# Altium PCB ATACS_PCB.PcbDoc
Units mm, origin at the board's own origin, x right, y up, seen from the top; angles counter-clockwise.
Board outline 80 x 100 mm, 4 copper layers (Top Layer, Signal Layer 1, Signal Layer 2, Bottom Layer), stack 1.534 mm thick; 103 components, 71 nets, 410 pads, 81 vias.
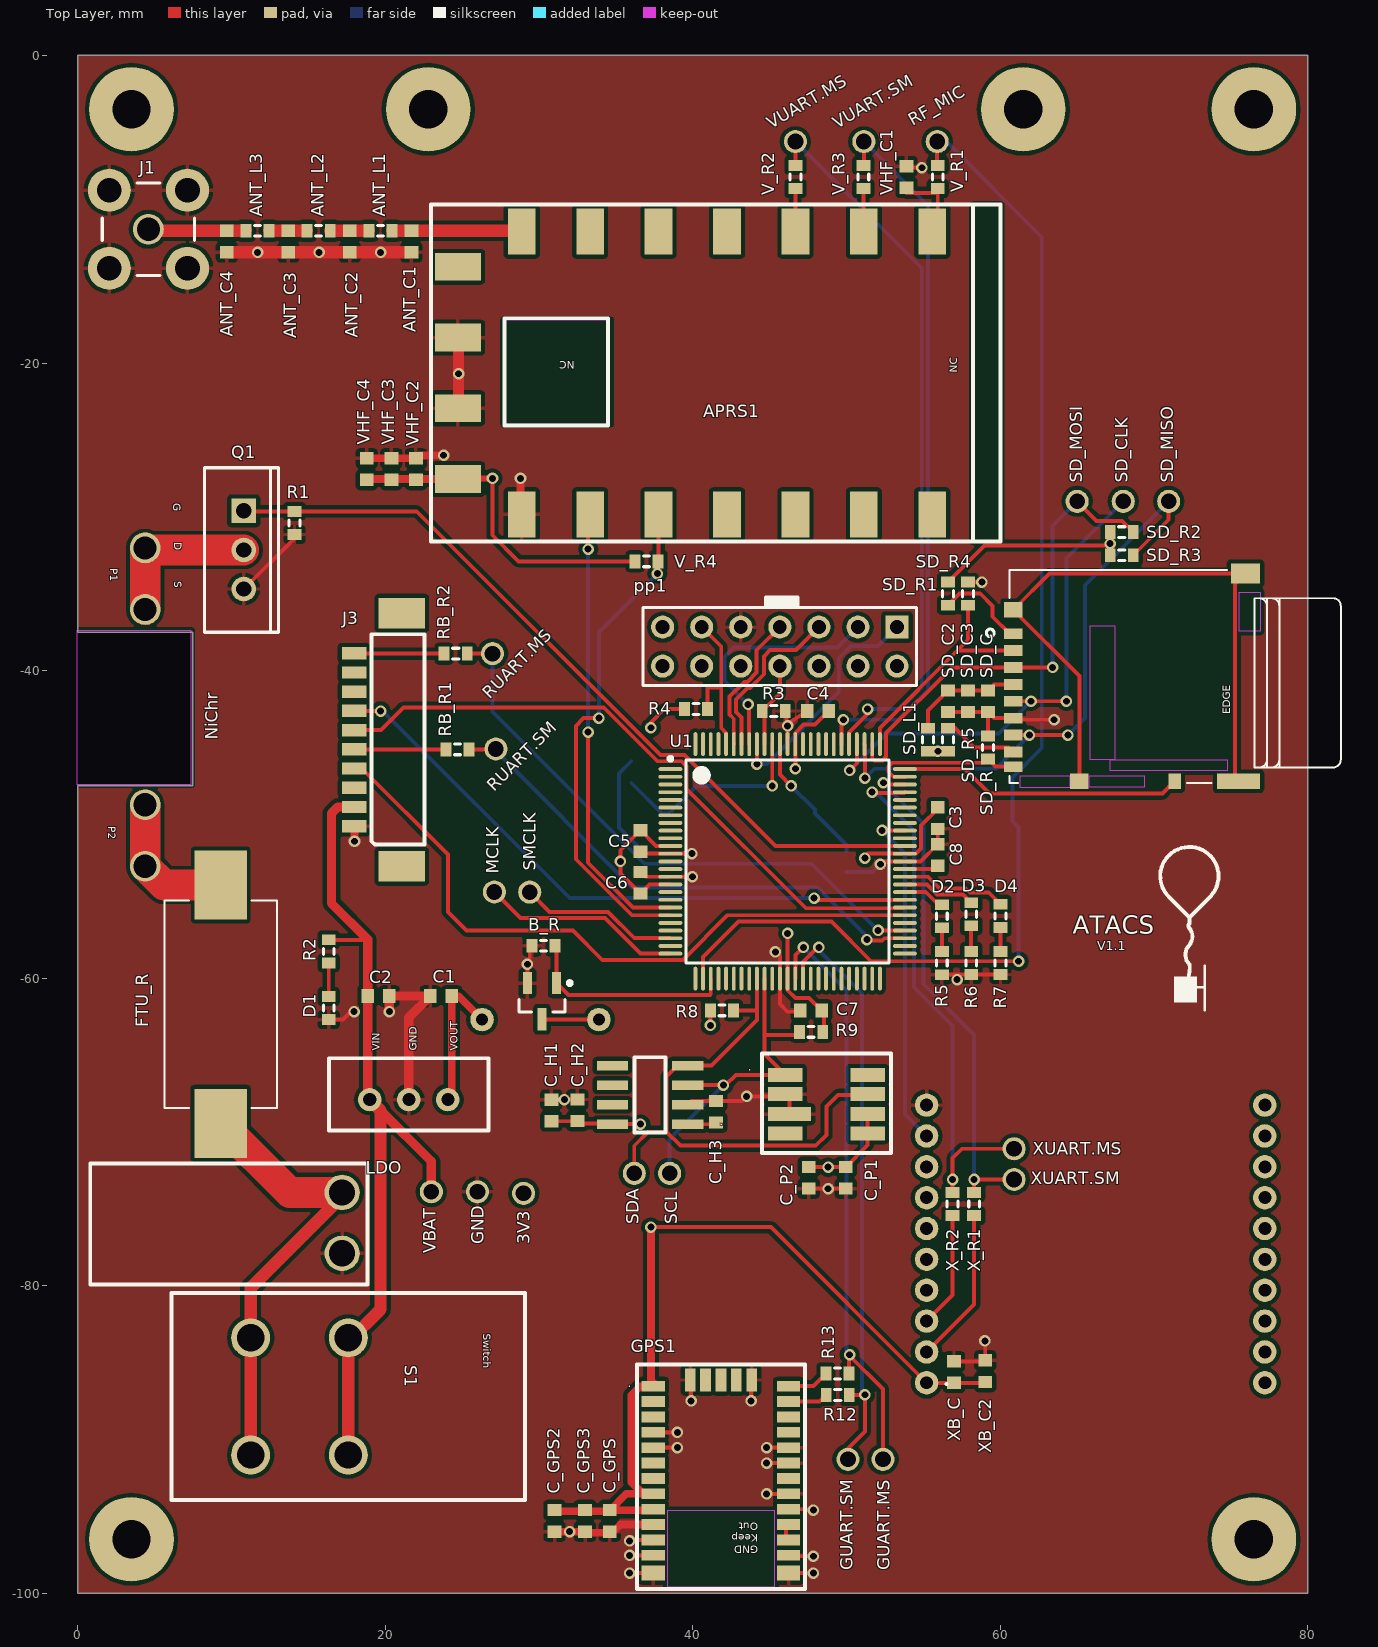
[diagram p0: Top Layer view]
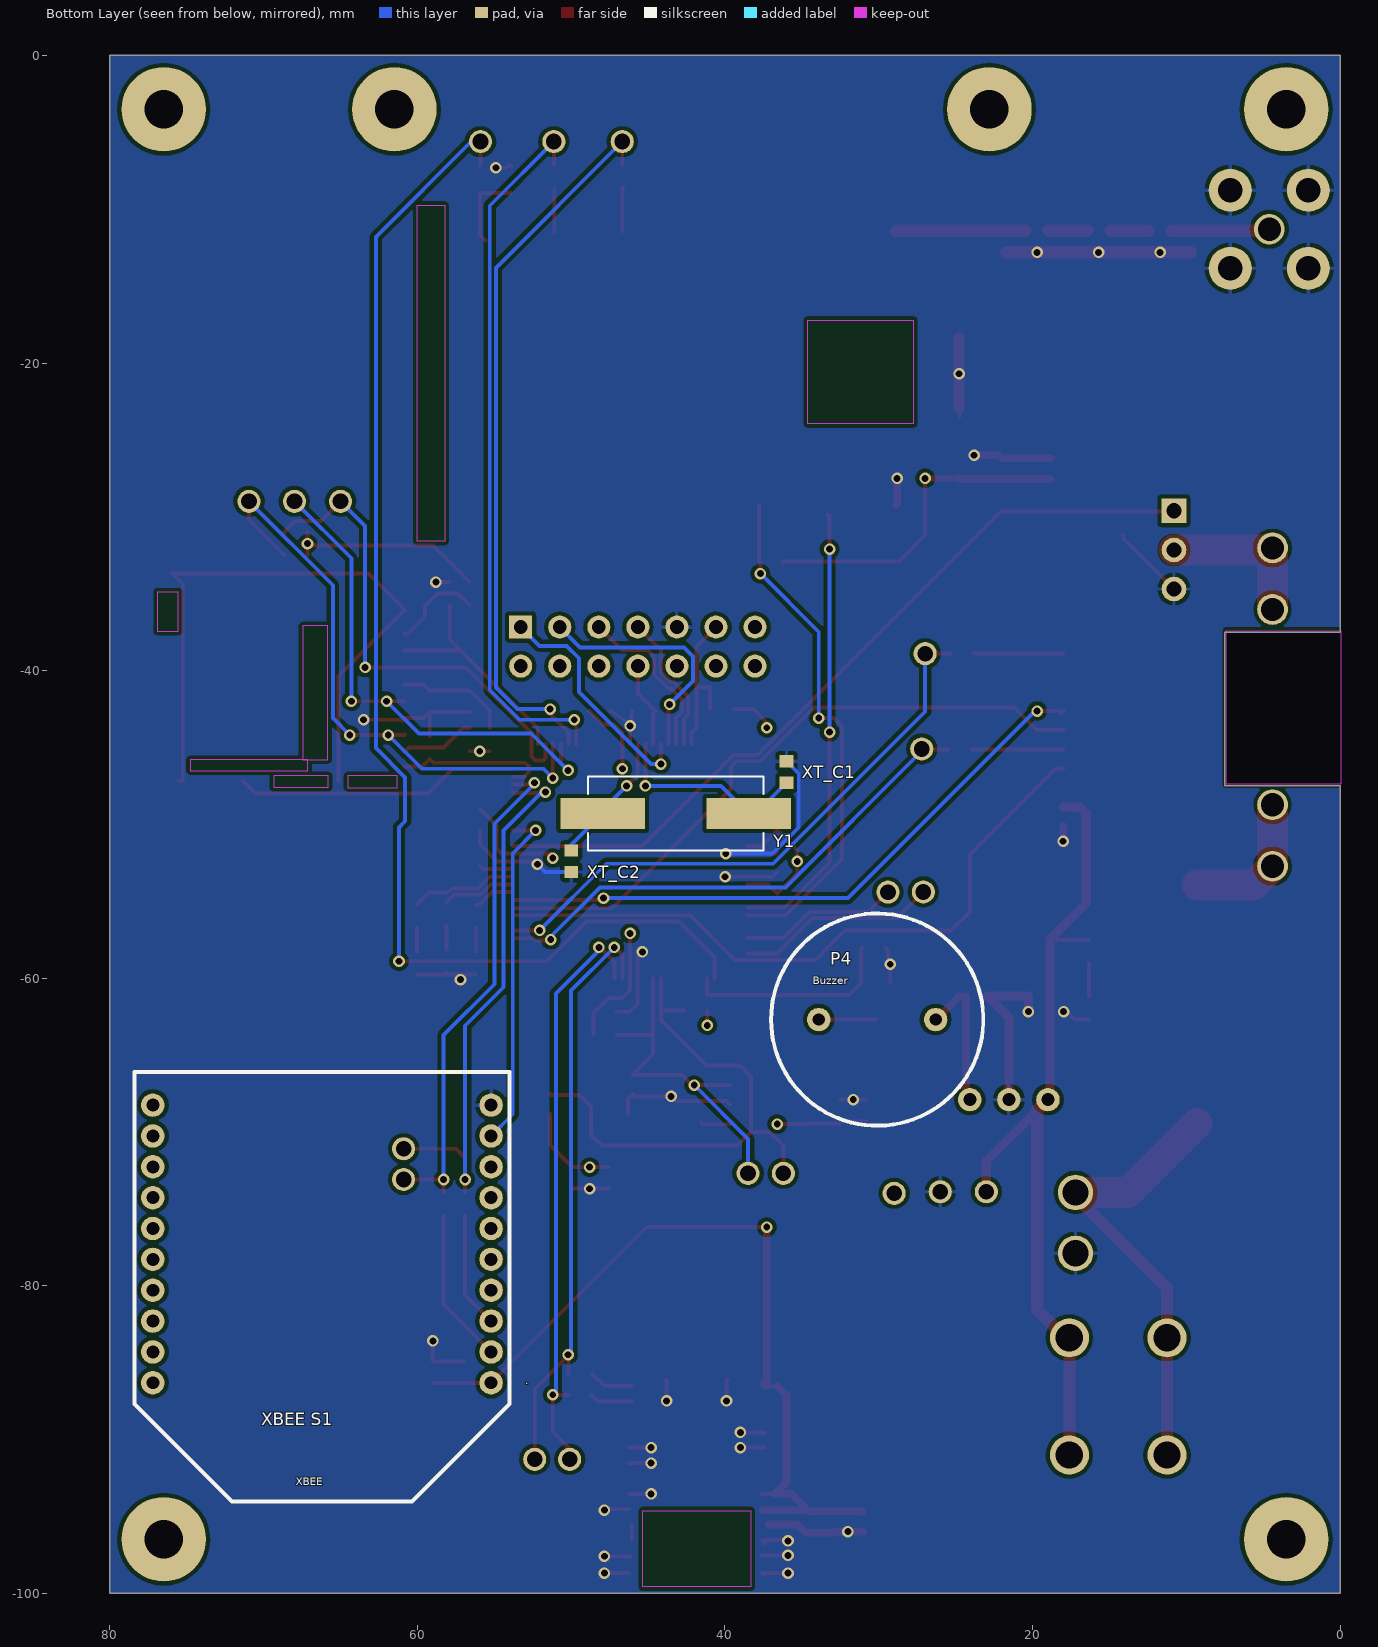
[diagram p1: Bottom Layer view, seen from below]
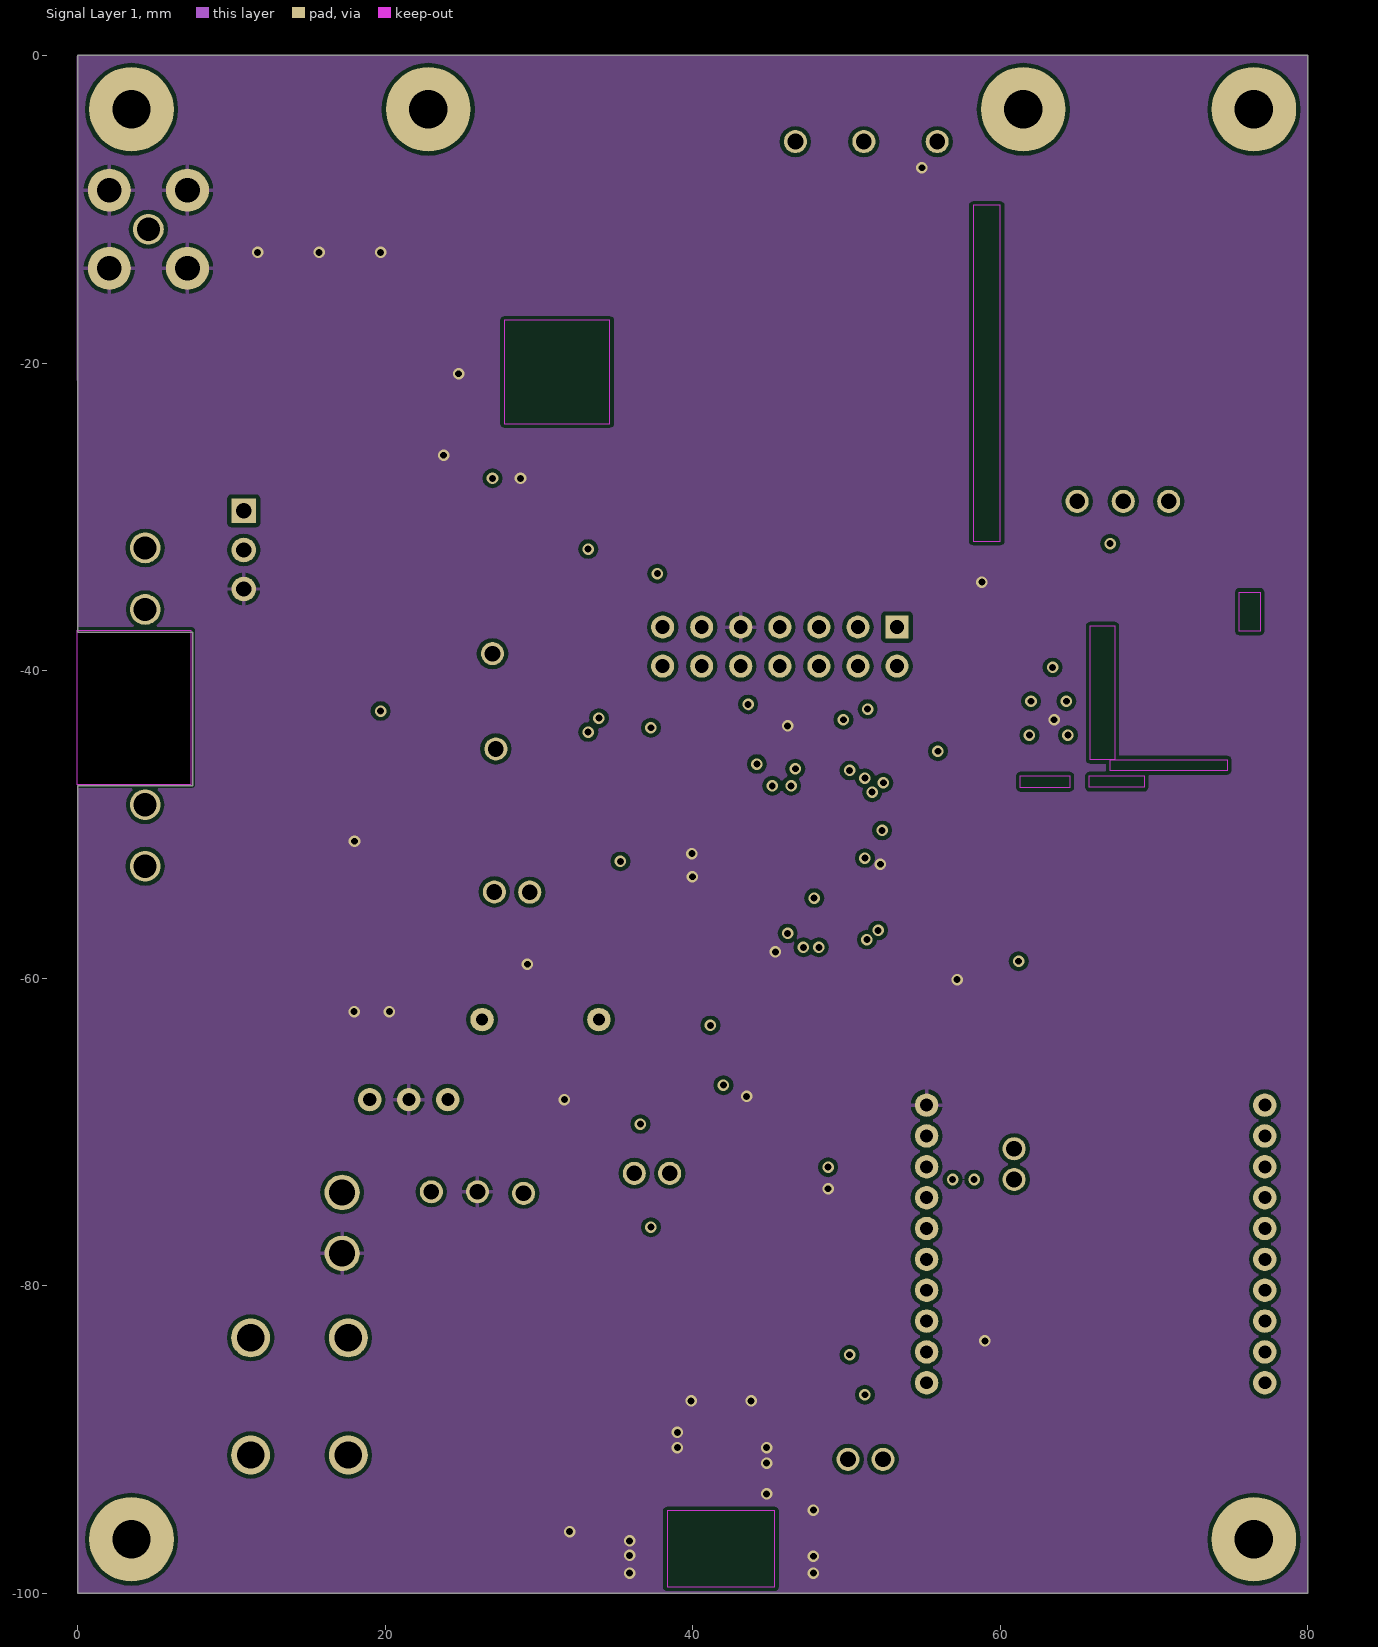
[diagram p2: Signal Layer 1]
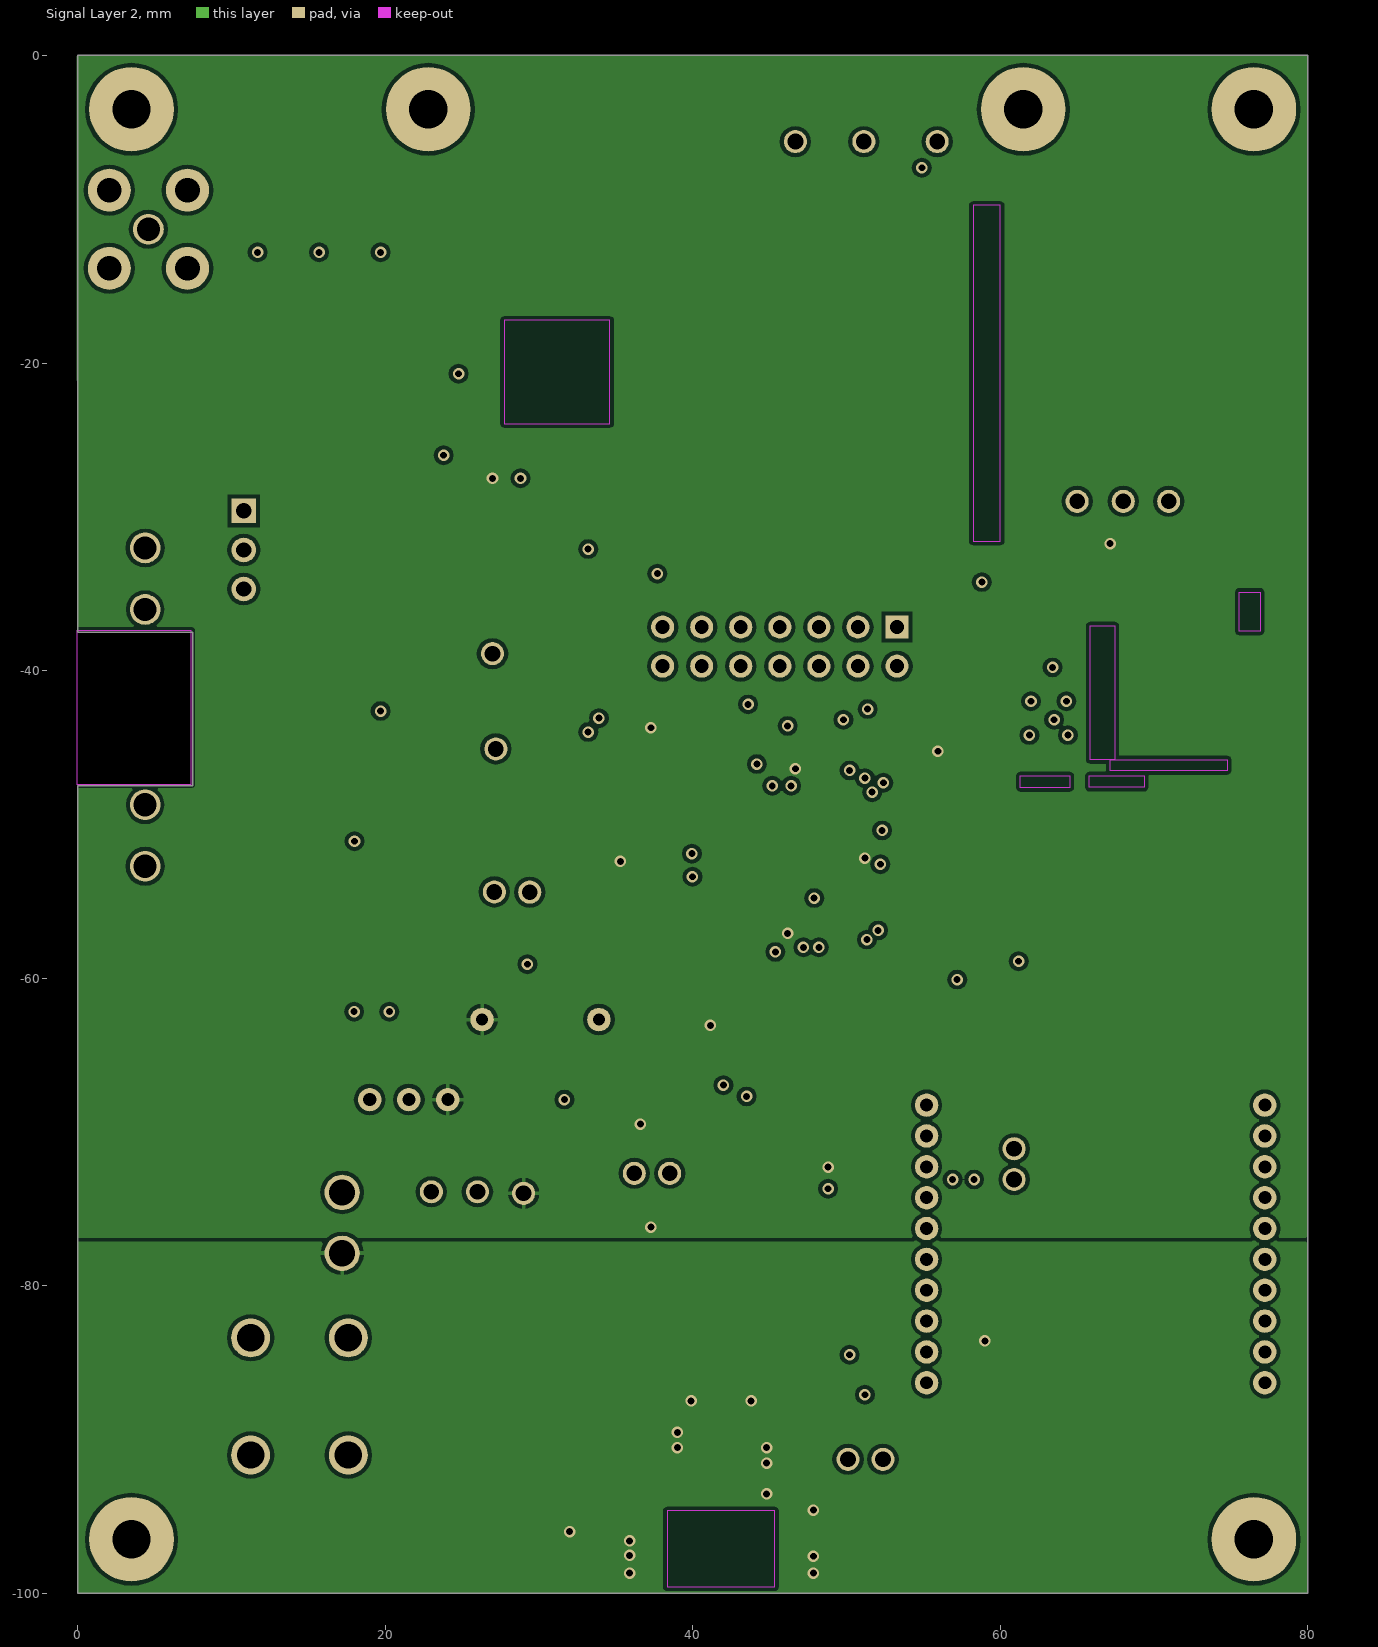
[diagram p3: Signal Layer 2]

## Layer stack, top to bottom
Top Solder: solder mask 0.0203, Solder Resist, Dk 3.5
Top Layer: signal copper 0.066
Dielectric 1: core 0.508, FR-4, Dk 4.2
Signal Layer 1: signal copper 0.066
Dielectric 3: prepreg 0.254, Dk 4.2
Signal Layer 2: signal copper 0.066
Dielectric 2: core 0.508, Dk 4.2
Bottom Layer: signal copper 0.066
Bottom Solder: solder mask 0.0203, Solder Resist, Dk 3.5

## Board outline
0,-100 0,-47.5 7.5,-47.5 7.5,-37.5 0,-37.5 0,0 80,0 80,-100
cut-out: -0.055,-47.4 7.4,-47.4 7.4,-37.426 -0.055,-37.426

## Design rules (kind name [scope] priority, off if disabled: settings)
AssemblyTestPointUsage SilkToBoardRegionClearance [All] p2:
Clearance "Clearance Pour" [InPolygon] p1: gap=0.254 ignorepadtopadclearanceinfootprint=FALSE except(0: Arc-Hole Track-Hole SMDPad-Hole THPad-Hole Via-Hole Fill-Hole Poly-Hole Region-Hole Text-Hole)
Clearance "Clearance Pad" [(IsPad) vs (IsPad)] p2: gap=0.14 ignorepadtopadclearanceinfootprint=FALSE except(0: Arc-Hole Track-Hole SMDPad-Hole THPad-Hole Via-Hole Fill-Hole Poly-Hole Region-Hole Text-Hole)
Clearance [All] p3: gap=0.152 ignorepadtopadclearanceinfootprint=FALSE except(0: Arc-Hole Track-Hole SMDPad-Hole THPad-Hole Via-Hole Fill-Hole Poly-Hole Region-Hole Text-Hole)
ComponentClearance [All] p1: gap=0 collisioncheckmode=3 verticalgap=0 showdistances=FALSE
Height [All] p1: minheight=0 maxheight=50.8 prefheight=12.7
HoleSize [All] p1: absolutevalues=TRUE maxlimit=6.35 minlimit=0.45 maxpercent=80.000 minpercent=20.000
HoleSize Testpoint [All] p2: absolutevalues=TRUE maxlimit=2.54 minlimit=0.025 maxpercent=80.000 minpercent=20.000
HoleSize TestPointUsage [All] p3: absolutevalues=TRUE maxlimit=2.54 minlimit=0.025 maxpercent=80.000 minpercent=20.000
MinimumAnnularRing [All] p1: minimumring=0.127
MinimumSolderMaskSliver [All] p1 off: minsoldermaskwidth=0.127
MinimumSolderMaskSliver SilkscreenOverComponentPads [All] p2 off: minsoldermaskwidth=0.254
PasteMaskExpansion [All] p1: expansion=0.051
PlaneClearance [All] p1: clearance=0.254
PlaneConnect [All] p1: planeconnectstyle=Direct reliefexpansion=0.508 reliefentries=4 reliefconductorwidth=0.508 reliefairgap=0.254
PolygonConnect PolygonConnectPads [(InPadClass('All Pads'))] p1: connectstyle=Relief reliefconductorwidth=0.254 reliefentries=4 polygonreliefangle="90 Angle" airgapwidth=0.254
PolygonConnect [All] p2: connectstyle=Direct reliefconductorwidth=0.508 reliefentries=4 polygonreliefangle="90 Angle" airgapwidth=0.254
RoutingVias [All] p1: holewidth=0.254 width=0.559 viastyle="Through Hole" minholewidth=0.254 minwidth=0.508 maxholewidth=6.35 maxwidth=25.4
SilkToBoardRegionClearance SilkToBoardRegionClearance2 [All] p1 off:
SilkToSilkClearance [All] p1 off: silktosilkclearance=0.127
SilkToSolderMaskClearance [IsPad] p1 off: minsilkscreentomaskgap=0.254 clearancetoexposedcopper=TRUE
SolderMaskExpansion [All] p1: expansion=0.102
Width Width_1 [All] p1: maxlimit=254 minlimit=0.127 preferedwidth=0.254
20 further rules are at their usual default settings.

## Classes and differential pairs
component class Telemetry: ANT_C1 ANT_C2 ANT_C3 ANT_C4 ANT_L1 ANT_L2 ANT_L3 APRS1 J1 J3 RB_R1 RB_R2 RF_MIC SD_C SD_C2 SD_C3 SD_L1 SD_R SD_R1 SD_R2 SD_R3 SD_R4 SD_R5 V_R1 V_R2 V_R3 V_R4 VHF_C1 VHF_C2 VHF_C3 VHF_C4 X_R1 X_R2 XB_C XB_C2 "XBEE S1"
component class Sensors: C_GPS C_GPS2 C_GPS3 C_H1 C_H2 C_H3 C_P1 C_P2 GPS1 R8 R9 R12 R13
component class MSP430: B_R C3 C4 C5 C6 C7 C8 D2 D3 D4 G_RX G_TX GUART.MS GUART.SM MCLK P4 R3 R4 R5 R6 R7 RUART.MS RUART.SM SCL "SCL1 TP" "SCL2 TP" SD_CLK SD_MISO SD_MOSI SDA "SDA1 TP" "SDA2 TP" SMCLK U1 VUART.MS VUART.SM XT_C1 XT_C2 XUART.MS XUART.MS1 XUART.SM XUART.SM1 Y1
component class EPS: 3V3 "3v3 ldo" C1 C2 D1 GND LDO R2 S1 VBAT
component class ATACS_SCH: FTU_R NiChr pp1 Q1 R1

## Components (designator, comment, footprint, x,y, rotation, side; value= is the part's Value field where it differs from the comment)
3V3 "Testpoint" TESTPOINT 29,-74 r90 top (schematic designator T3V3)
ANT_C1 "Ceramic" 1608[0603] 21.7,-12.1 r90 top value=20pF
ANT_C2 "Ceramic" 1608[0603] 17.7,-12.1 r90 top value=36pF
ANT_C3 "Ceramic" 1608[0603] 13.7,-12.1 r90 top value=36pF
ANT_C4 "Ceramic" 1608[0603] 9.7,-12.1 r90 top value=20pF
ANT_L1 "Inductor" J1-0603 19.7,-11.4 r180 top value=56nH
ANT_L2 "Inductor" J1-0603 15.671,-11.4 r180 top value=68nH
ANT_L3 "Inductor" J1-0603 11.7,-11.4 r180 top value=56nH
APRS1 "RF Transmitter" "APRS Transmitter" 42.229,-20.645 r180 top
B_R "Resistor" J1-0603 30.3,-57.9 r0 top value=10k
"Battery Connector1" "Header 2H" BAT 17.2,-77.9 r90 top
C1 "Cer" 1608[0603] 23.629,-61.175 r0 top value=1uF
C2 "Cer" 1608[0603] 19.568,-61.175 r0 top value=4.7uF
C3 "Capacitor Ceramic" 1608[0603] 55.935,-49.6 r90 top value=0.1uF
C4 "Capacitor Ceramic" 1608[0603] 48.14,-42.633 r0 top value=0.1uF
C5 "Capacitor Ceramic" 1608[0603] 36.6,-51.088 r90 top value=0.1uF
C6 "Capacitor Ceramic" 1608[0603] 36.6,-53.8 r270 top value=0.1uF
C7 "Capacitor Ceramic" 1608[0603] 47.7,-62.1 r0 top value=0.1uF
C8 "Capacitor Ceramic" 1608[0603] 55.935,-52 r90 top value=0.47uF
C_GPS "Cap" 1608[0603] 34.6,-95.3 r90 top value=0.1uF
C_GPS2 "Cap" 1608[0603] 31.017,-95.3 r90 top value=100pF
C_GPS3 "Cap" 1608[0603] 33,-95.3 r90 top value=4.7uF
C_H1 "Cap" 1608[0603] 30.806,-68.611 r270 top value=100pF
C_H2 "Cap" 1608[0603] 32.5,-68.6 r270 top value=0.1uF
C_H3 "Cap" 1608[0603] 41.524,-68.7 r270 top value=100pF
C_P1 "Cap" 1608[0603] 49.956,-72.989 r90 top value=100pF
C_P2 "Cap" 1608[0603] 47.543,-72.989 r90 top value=0.1uF
D1 "LED0" J1-0603 16.328,-61.949 r270 top
D2 "LED" J1-0603 56.206,-55.98 r90 top
D3 "LED" J1-0603 58.111,-55.853 r90 top
D4 "LED" J1-0603 60.016,-55.956 r90 top
FTU_R "Resistor" *RES_SMW52R0JT 9.3,-61.7 r270 top value=2
GND "Testpoint" TESTPOINT 26,-73.9 r270 top (schematic designator TGND)
GPS1 "GPS" "CAM M8C GPS" 41.835,-92.743 r180 top
GUART.MS "Testpoint" TESTPOINT 52.373,-91.3 r90 top
GUART.SM "Testpoint" TESTPOINT 50.1,-91.3 r90 top
Humid1 "Temperature and Humidity Sensor" "Humidity Sensor" 37.224,-67.6 r90 top
J1 "COAX-F" MCX_RF_SMA_F 4.6,-11.3 r270 top
J2 "SD_CARD" SD_CARD 60.848,-40.8 r90 top
J3 "RockBLOCK connector" "RockBLOCK Connector" 19.879,-44.5 r90 top
LDO "3v3 LDO" 3V3LDO 18.995,-67.906 r0 top
MCLK "Testpoint" TESTPOINT 27.1,-54.4 r90 top
Mosfet_Buzzer "MOSFET-N" SOT-23_M 30.2,-61.5 r270 top
NiChr "Nichrome" Nichrome 4.39,-36.029 r270 top
P4 "Buzzer" Buzzer 30.1,-62.7 r180 bottom
pp1 "Header 7X2" HDR2X7 53.285,-37.172 r180 top
"Pressure Sensor1" "Pressure Sensor" "Pressure Sensor" 48.7,-68.2 r0 top
Q1 "MOSFET-N" MOSFET 10.8,-32.16 r270 top
R1 "Resistor" J1-0603 14.1,-30.4 r270 top value=47k
R2 "Res1" J1-0603 16.328,-58.266 r90 top value=470
R3 "Resistor" J1-0603 45.272,-42.633 r180 top value=10k
R4 "Resistor" J1-0603 40.216,-42.506 r0 top value=47k
R5 "Resistor" J1-0603 56.206,-59.028 r90 top value=470
R6 "Resistor" J1-0603 58.111,-59.016 r90 top value=470
R7 "Resistor" J1-0603 60.016,-59.016 r90 top value=470
R8 "Res1" J1-0603 41.9,-62.1 r180 top value=10k
R9 "Res1" J1-0603 47.7,-63.5 r0 top value=10k
R12 "Res3" J1-0603 49.433,-87.114 r180 top value=47
R13 "Res3" J1-0603 49.421,-85.717 r180 top value=47
RB_R1 "Res3" J1-0603 24.7,-45.125 r0 top value=47
RB_R2 "Res3" J1-0603 24.583,-38.9 r0 top value=47
RF_MIC "Testpoint" TESTPOINT 55.9,-5.6 r270 top
RUART.MS "Testpoint" TESTPOINT 26.979,-38.9 r90 top
RUART.SM "Testpoint" TESTPOINT 27.2,-45.1 r90 top
S1 "SW-SPST" Switch 17.6,-91.02 r0 top
SCL "Testpoint" TESTPOINT 38.5,-72.7 r0 top
SD_C "Ceramic" 1608[0603] 59.2,-42 r90 top value=47uF
SD_C2 "Ceramic" 1608[0603] 56.6,-42 r90 top value=0.1uF
SD_C3 "Ceramic" 1608[0603] 57.9,-42 r90 top value=4.7uF
SD_CLK "Testpoint" TESTPOINT 68,-29 r90 top
SD_L1 "Inductor" J1-0603 55.3,-44.5 r270 top value=470nH
SD_MISO "Testpoint" TESTPOINT 70.955,-29 r90 top
SD_MOSI "Testpoint" TESTPOINT 65,-29 r90 top
SD_R "Resistor" J1-0603 59.2,-45 r270 top value=10k
SD_R1 "Resistor" J1-0603 56.6,-35 r90 top value=100k
SD_R2 "Resistor" J1-0603 67.9,-31 r180 top value=10k
SD_R3 "Resistor" J1-0603 67.9,-32.5 r180 top value=100k
SD_R4 "Resistor" J1-0603 57.9,-35 r270 top value=1M
SD_R5 "Resistor" J1-0603 56.6,-44.5 r90 top value=100k
SDA "Testpoint" TESTPOINT 36.2,-72.7 r0 top
SMCLK "Testpoint" TESTPOINT 29.4,-54.412 r90 top
U1 "MSP430F5438A" TSQFP50P1600X1600X160-100L 46.173,-52.412 r0 top locked
V_R1 "Resistor" J1-0603 55.935,-7.9 r90 top value=120
V_R2 "Res3" J1-0603 46.679,-7.9 r90 top value=47
V_R3 "Res3" J1-0603 51.1,-7.9 r90 top value=47
V_R4 "Resistor" J1-0603 37,-32.9 r180 top value=10k
VBAT "Testpoint" TESTPOINT 23,-73.9 r90 top (schematic designator T_BAT)
VHF_C1 "Ceramic" 1608[0603] 53.9,-7.9 r270 top value=470nF
VHF_C2 "Ceramic" 1608[0603] 22,-26.9 r270 top value=0.1uF
VHF_C3 "Ceramic" 1608[0603] 20.4,-26.9 r270 top value=47uF
VHF_C4 "Ceramic" 1608[0603] 18.8,-26.9 r270 top value=4.7uF
VUART.MS "Testpoint" TESTPOINT 46.679,-5.6 r270 top
VUART.SM "Testpoint" TESTPOINT 51.129,-5.6 r270 top
X_R1 "Res3" J1-0603 58.3,-74.7 r270 top value=47
X_R2 "Res3" J1-0603 56.9,-74.7 r270 top value=47
XB_C "Ceramic" 1608[0603] 56.993,-85.626 r270 top value=8.2pF
XB_C2 "Ceramic" 1608[0603] 59.025,-85.564 r270 top value=1uF
"XBEE S1" "XBEE" XBEE 66.208,-80.073 r180 bottom locked
XT_C1 "Capacitor Ceramic" 1608[0603] 36,-46.6 r270 bottom value=27pF
XT_C2 "Capacitor Ceramic" 1608[0603] 50,-52.4 r90 bottom value=27pF
XUART.MS "Testpoint" TESTPOINT 60.9,-71.1 r90 top
XUART.SM "Testpoint" TESTPOINT 60.9,-73.1 r90 top
Y1 "ECS-160-18-5PXEN-TR" *XTAL_ECS-160-18-5PXEN-TR 43.2,-49.3 r180 bottom

## Footprints (in the part's own frame and the unit in brackets; to place one, negate y for a bottom-side part, rotate by r counter-clockwise, add the part's x,y. Pads: shape width x height; smd on the part's side, far side on the other; paste and mask are expansions set on the pad)
3V3LDO [mil]
  round 60 hole 33.46: 1(0,0) 2(100,0) 3(200,0)
  silkscreen extent -104,-79 304,106
1608[0603] [mm] "Chip Capacitor, Body 1.6x0.8mm, IPC High Density"
  rect 0.8x0.9 smd: 1(-0.7,0) 2(0.7,0)
  body extent -0.87,-0.48 0.87,0.48, height 1.3
*RES_SMW52R0JT [mm]
  rect 4.5x3.4 smd: 1(-7.75,0) 2(7.75,0)
  silkscreen extent -6.75,-3.65 6.75,3.65
*XTAL_ECS-160-18-5PXEN-TR [mm]
  rect 5.5x2 smd: 1(-4.75,0) 2(4.75,0)
  silkscreen extent -5.7,-2.4 5.7,2.4
"APRS Transmitter" [mm] "DRA818V"
  rect 1.8x3 smd: 1(-13.35,9.2) 2(-8.9,9.2) 3(-4.45,9.2) 4(0,9.2) 5(4.45,9.2) 6(8.9,9.2) 7(13.35,9.2) 12(13.35,-9.2) 13(8.9,-9.2) 14(4.45,-9.2) 15(0,-9.2) 16(-4.45,-9.2) 17(-8.9,-9.2) 18(-13.35,-9.2)
  rect 3x1.8 smd: 8(17.5,6.9) 9(17.5,2.3) 10(17.5,-2.3) 11(17.5,-6.9)
  Keep-Out Layer region: 7.62,-3.429 14.478,-3.429 14.478,3.302 7.62,3.302
  Keep-Out Layer region: -17.78,-10.9 -16.002,-10.9 -16.002,10.95 -17.78,10.95
  silkscreen extent -17.8,-10.95 19.25,10.95
BAT [mm]
  round 2.3 hole 1.7: 1(0,0) 2(3.96,0)
  silkscreen extent -2.03,-1.65 5.84,16.38
Buzzer [mm]
  round 1.524 hole 0.8: 1(-3.8,0) 2(3.8,0)
  silkscreen extent -6.9,-6.9 6.9,6.9
"CAM M8C GPS" [mm]
  rect 1.5x0.7 smd: 1(4.4,-6.2) 2(4.4,-5.2) 3(4.4,-4.2) 4(4.4,-3.2) 5(4.4,-2.2) 6(4.4,-1.2) 7(4.4,-0.2) 8(4.4,0.8) 9(4.4,1.8) 10(4.4,2.8) 11(4.4,3.8) 12(4.4,4.8) 15(-4.4,4.8) 16(-4.4,3.8) 17(-4.4,2.8) 18(-4.4,1.8) 19(-4.4,0.8) 20(-4.4,-0.2) 21(-4.4,-1.2) 22(-4.4,-2.2) 23(-4.4,-3.2) 24(-4.4,-4.2) 25(-4.4,-5.2) 26(-4.4,-6.2)
  rect 1.5x1 smd: 13(4.4,5.95) 14(-4.4,5.95)
  rect 0.7x1.5 smd: 27(-2,-6.6) 28(-1,-6.6) 29(0,-6.6) 30(1,-6.6) 31(2,-6.6)
  Keep-Out Layer region: -3.5,1.905 3.5,1.905 3.5,6.858 -3.5,6.858
  silkscreen extent -5.46,-7.6 5.46,7
HDR2X7 [mm] "Connector; Header; 7x2 Position"
  rect 1.5x1.5 hole 0.9: 1(0,0)
  round 1.5 hole 0.9: 2(0,2.54) 3(2.54,0) 4(2.54,2.54) 5(5.08,0) 6(5.08,2.54) 7(7.62,0) 8(7.62,2.54) 9(10.16,0) 10(10.16,2.54) 11(12.7,0) 12(12.7,2.54) 13(15.24,0) 14(15.24,2.54)
  silkscreen extent -1.27,-1.27 16.51,3.81
"Humidity Sensor" [mm] "HIH6030-021-001"
  rect 0.61x2.03 smd: 1(-1.905,-2.45) 2(-0.635,-2.45) 3(0.635,-2.45) 4(1.905,-2.45) 5(1.905,2.45) 6(0.635,2.45) 7(-0.635,2.45) 8(-1.905,2.45)
  silkscreen extent -2.45,-1.02 2.45,1.02
J1-0603 [mm] "Chip Resistor, Body 1.6x0.8mm, IPC High Density"
  rect 0.7x0.9 smd: 1(-0.75,0) 2(0.75,0)
  silkscreen extent -0.2,-0.35 0.2,0.35, body extent -0.85,-0.48 0.85,0.48, height 0.9
MCX_RF_SMA_F [mm]
  round 2 hole 1.5: 1(0,0)
  round 2.8 hole 1.6: 2(-2.54,-2.54) 3(2.54,-2.54) 4(2.54,2.54) 5(-2.54,2.54)
  silkscreen extent -3,-3 3,3
MOSFET [mm] "TO, Thru-Hole, Vertical, Heatsink Mounted; 3 In-Line Leads; Pitch 2.54 mm"
  rect 1.6x1.6 hole 1: 1(-2.54,0)
  round 1.6 hole 1: 2(0,0) 3(2.54,0)
  silkscreen extent -5.35,-2.55 5.35,2.25
Nichrome [mm]
  round 2 hole 1.5: 1(-4,0) 1(0,0) 2(12.7,0) 2(16.7,0)
"Pressure Sensor" [mm] "MS580301BA01-00"
  rect 2.25x0.9 smd: 1(-2.675,1.9) 2(-2.675,0.65) 4(-2.675,-1.9) 5(2.675,-1.9) 6(2.675,-0.65) 7(2.675,0.65) 8(2.675,1.9)
  rect 2.8x0.9 smd: 3(-2.4,-0.65)
  silkscreen extent -4.19,-3.18 4.19,3.3
"RockBLOCK Connector" [mm]
  rect 0.8x1.6 smd: 1(-5.625,1.9) 2(-4.375,1.9) 3(-3.125,1.9) 4(-1.875,1.9) 5(-0.625,1.9) 6(0.625,1.9) 7(1.875,1.9) 8(3.125,1.9) 9(4.375,1.9) 10(5.625,1.9)
  rect 2x3 smd: ""(-8.225,-1.2) ""(8.225,-1.2)
  silkscreen extent -6.83,-2.67 6.86,0.76
SD_CARD [mm]
  rect 0.7x1.2 smd: 1(3.2,0) 2(2.1,0) 3(1,0) 4(-0.1,0) 5(-1.2,0) 6(-2.3,0) 7(-3.4,0) 8(-4.5,0) SWB(-5.45,0)
  rect 1x1.2 smd: P1(-6.4,-4.3) P4(4.75,0)
  rect 1x2.8 smd: P2(-6.4,-14.65)
  rect 1.3x1.9 smd: P3(7.1,-15.1)
  rect 1x0.8 smd: SWA(-6.4,-10.5)
  Keep-Out Layer region: 3.351,-14.7 5.9,-14.7 5.9,-16.057 3.351,-16.057
  Keep-Out Layer region: -5.003,-5 3.7,-5 3.7,-6.604 -5.003,-6.604
  Keep-Out Layer region: -5.706,-6.3 -5,-6.3 -5,-13.915 -5.706,-13.915
  Keep-Out Layer region: -6.804,-4.953 -6.05,-4.953 -6.05,-8.505 -6.804,-8.505
  Keep-Out Layer region: -6.813,-0.45 -6.05,-0.45 -6.05,-3.683 -6.813,-3.683
  Keep-Out Layer region: 3.351,-14.7 5.9,-14.7 5.9,-16.057 3.351,-16.057
  Keep-Out Layer region: -5.003,-5 3.7,-5 3.7,-6.604 -5.003,-6.604
  Keep-Out Layer region: -5.706,-6.3 -5,-6.3 -5,-13.915 -5.706,-13.915
  Keep-Out Layer region: 3.351,-14.7 5.9,-14.7 5.9,-16.057 3.351,-16.057
  Keep-Out Layer region: -5.003,-5 3.7,-5 3.7,-6.604 -5.003,-6.604
  Keep-Out Layer region: -5.706,-6.3 -5,-6.3 -5,-13.915 -5.706,-13.915
  silkscreen extent -6.5,-21.3 7.35,1.75
SOT-23_M [mm] "SOT23, 3-Leads, Body 2.9x1.3mm, Pitch 0.95mm, Lead Span 2.5mm, IPC Low Density"
  rect 1.45x0.6 smd: 1(-1.175,0.95) 2(-1.175,-0.95) 3(1.175,0)
  silkscreen extent -1.3,-1.5 0.7,1.93, body extent -0.7,-1.5 0.7,1.5, height 1.1
Switch [mil]
  round 100 hole 70: 1(-250,0) 1(-250,300) 2(0,0) 2(0,300)
  silkscreen extent -453,-115 453,415
TESTPOINT [mm]
  round 1.5 hole 1.02: 1(0,0)
TSQFP50P1600X1600X160-100L [mm] "TSQFP, 100-Leads, Body 14.00x14.00mm, Pitch 0.50mm, IPC High Density"
  oval 1.55x0.25 smd: 1(-7.625,6) 2(-7.625,5.5) 3(-7.625,5) 4(-7.625,4.5) 5(-7.625,4) 6(-7.625,3.5) 7(-7.625,3) 8(-7.625,2.5) 9(-7.625,2) 10(-7.625,1.5) 11(-7.625,1) 12(-7.625,0.5) 13(-7.625,0) 14(-7.625,-0.5) 15(-7.625,-1) 16(-7.625,-1.5) 17(-7.625,-2) 18(-7.625,-2.5) 19(-7.625,-3) 20(-7.625,-3.5) 21(-7.625,-4) 22(-7.625,-4.5) 23(-7.625,-5) 24(-7.625,-5.5) 25(-7.625,-6) 51(7.625,-6) 52(7.625,-5.5) 53(7.625,-5) 54(7.625,-4.5) 55(7.625,-4) 56(7.625,-3.5) 57(7.625,-3) 58(7.625,-2.5) 59(7.625,-2) 60(7.625,-1.5) 61(7.625,-1) 62(7.625,-0.5) 63(7.625,0) 64(7.625,0.5) 65(7.625,1) 66(7.625,1.5) 67(7.625,2) 68(7.625,2.5) 69(7.625,3) 70(7.625,3.5) 71(7.625,4) 72(7.625,4.5) 73(7.625,5) 74(7.625,5.5) 75(7.625,6)
  oval 0.25x1.55 smd: 26(-6,-7.625) 27(-5.5,-7.625) 28(-5,-7.625) 29(-4.5,-7.625) 30(-4,-7.625) 31(-3.5,-7.625) 32(-3,-7.625) 33(-2.5,-7.625) 34(-2,-7.625) 35(-1.5,-7.625) 36(-1,-7.625) 37(-0.5,-7.625) 38(0,-7.625) 39(0.5,-7.625) 40(1,-7.625) 41(1.5,-7.625) 42(2,-7.625) 43(2.5,-7.625) 44(3,-7.625) 45(3.5,-7.625) 46(4,-7.625) 47(4.5,-7.625) 48(5,-7.625) 49(5.5,-7.625) 50(6,-7.625) 76(6,7.625) 77(5.5,7.625) 78(5,7.625) 79(4.5,7.625) 80(4,7.625) 81(3.5,7.625) 82(3,7.625) 83(2.5,7.625) 84(2,7.625) 85(1.5,7.625) 86(1,7.625) 87(0.5,7.625) 88(0,7.625) 89(-0.5,7.625) 90(-1,7.625) 91(-1.5,7.625) 92(-2,7.625) 93(-2.5,7.625) 94(-3,7.625) 95(-3.5,7.625) 96(-4,7.625) 97(-4.5,7.625) 98(-5,7.625) 99(-5.5,7.625) 100(-6,7.625)
  silkscreen extent -7.75,-6.6 6.6,6.8, body extent -8,-8 8,8, height 1.6
XBEE [mil] "XBEE S2C"
  round 60 hole 33: 1(433,-246) 2(433,-167) 3(433,-88) 4(433,-9) 5(433,70) 6(433,149) 7(433,228) 8(433,307) 9(433,386) 10(433,465) 11(-433,465) 12(-433,386) 13(-433,307) 14(-433,228) 15(-433,149) 16(-433,70) 17(-433,-9) 18(-433,-88) 19(-433,-167) 20(-433,-246)
  silkscreen extent -480,-550 480,550

## Part data
3V3 GND GUART.MS GUART.SM MCLK RF_MIC RUART.MS RUART.SM SCL SD_CLK SD_MISO SD_MOSI SDA SMCLK VBAT VUART.MS VUART.SM XUART.MS XUART.SM: "Probe point for testing"
ANT_C1 ANT_C2 ANT_C3 ANT_C4 C1 C2 SD_C SD_C2 SD_C3 VHF_C1 VHF_C2 VHF_C3 VHF_C4 XB_C XB_C2: library part Cap, "Capacitor", LatestRevisionDate=17-Jul-2002, LatestRevisionNote="Re-released for DXP Platform.", PackageDescription="Radial Cap, Thru-Hole; 2 Leads; 0.3 in Pin Spacing", PackageReference=RAD-0.3, Published=8-Jun-2000, Publisher="Altium Limited"
APRS1: "DRA818V"
B_R FTU_R R1 R3 R4 R5 R6 R7 SD_R SD_R1 SD_R2 SD_R3 SD_R4 SD_R5 V_R1 V_R4: "Resistive element"
"Battery Connector1": "Header, 2-Pin, Right Angle", LatestRevisionDate=17-Jul-2002, LatestRevisionNote="Re-released for DXP Platform.", Publisher="Altium Limited"
C_GPS C_GPS2 C_GPS3 C_H1 C_H2 C_H3 C_P1 C_P2: "Capacitor", LatestRevisionDate=17-Jul-2002, LatestRevisionNote="Re-released for DXP Platform.", PackageDescription="Radial Cap, Thru-Hole; 2 Leads; 0.3 in Pin Spacing", PackageReference=RAD-0.3, Published=8-Jun-2000, Publisher="Altium Limited"
D1: "Typical INFRARED GaAs LED", LatestRevisionDate=08-Jul-2005, LatestRevisionNote="Mech Layer 1 removed.", PackageDescription="LED; 2 Leads", PackageReference=LED-0, Published=8-Jun-2000, Publisher="Altium Limited"
GPS1: "CAM M8C"
Humid1: "HIH6030-021-001"
J1: "RF Coaxial PCB Connector, MCX; Thru-Hole, Right-Angle Mount Socket, Blunt Post Terminal, 50 Ohm Impedance", PackageDocument=04-Jul-1999, ComponentLink1Description="Manufacturer Link", ComponentLink1URL=http://www.amphenolrf.com/, DatasheetDocument=30-May-2003, DrillSize="Corresponds to nominal value.", LatestRevisionDate=15-Jul-2004, LatestRevisionNote="Component Replaced.", PackageReference=919-119J-51AX, PCB_Layout="Complies with manufacturer's recommendation.", Published=15-Jul-2004, Publisher="Altium Limited"
J2: library part DM3AT-SF-PEJM5, "DM3 RA SMT microSD memory card push/push", Package=None, Digi-Key_Part_Number=HR1964CT-ND, Digi-Key_Purchase_URL=https://www.digikey.com/product-detail/en/hirose-electric-co-ltd/DM3AT-SF-PEJM5/HR1964CT-ND/2533566?utm_source=snapeda&utm_medium=aggregator&utm_campaign=symbol, MF=Hirose, MP=DM3AT-SF-PEJM5, SnapEDA_Link=https://www.snapeda.com/parts/DM3AT-SF-PEJM5/Hirose%20Electric%20Co%20Ltd/view-part/?ref=snap
LDO: "MCP1826S-3302E/AB"
Mosfet_Buzzer Q1: "N-Channel MOSFET", LatestRevisionDate=17-Jul-2002, LatestRevisionNote="Re-released for DXP Platform.", PackageDescription="TO, Flat Index; 3 In-Line, Axial Leads; Body Dia. 4.6mm; Lead Dia. 0.5 mm (max)", PackageReference=E3, PackageVersion=1995/1996, Published=8-Jun-2000, Publisher="Altium Limited"
NiChr P4: library part "Header 2", "Header, 2-Pin", LatestRevisionDate=17-Jul-2002, LatestRevisionNote="Re-released for DXP Platform.", Publisher="Altium Limited"
pp1: "Header, 7-Pin, Dual row", LatestRevisionDate=17-Jul-2002, LatestRevisionNote="Re-released for DXP Platform.", Publisher="Altium Limited"
"Pressure Sensor1": "MS580301BA01-00"
R2 R8 R9 R12 R13 RB_R1 RB_R2 V_R2 V_R3 X_R1 X_R2: "Resistor", Published=8-Jun-2000, Publisher="Altium Limited"
  R2 R8 R9: LatestRevisionDate=17-Jul-2002, LatestRevisionNote="Re-released for DXP Platform.", PackageDescription="Axial Device, Thru-Hole; 2 Leads; 0.3 in Pin Spacing", PackageReference=AXIAL-0.3
  R12 R13 RB_R1 RB_R2 V_R2 V_R3 X_R1 X_R2: LatestRevisionDate=29-May-2009, LatestRevisionNote="IPC-7351 Footprint Added.", PackageDescription="Chip Resistor", PackageReference=J1-0603
S1: "Single-Pole, Single-Throw Switch", LatestRevisionDate=17-Jul-2002, LatestRevisionNote="Re-released for DXP Platform.", PackageDescription="Switch; 2 Leads", PackageReference=SPST-2, Published=24-Mar-1999, Publisher="Altium Limited"
U1: library part MSP430F438IPZ, Manufacturer="Texas Instruments", Manufacturer Part Number=MSP430F5438AIPZR, Operating Temperature="-40°C ~ 85°C", Package / Case=100-LQFP, Supplier Device Package="100-LQFP (14x14)", Supplier Part Number 1=296-37147-1-ND, Voltage - Supply (Vcc/Vdd)="1.8 V ~ 3.6 V", Category="Integrated Circuits (ICs)", ComponentLink1Description=http://www.ti.com/lit/ds/symlink/msp430f5418a.pdf, ComponentLink1URL=http://www.ti.com/lit/ds/symlink/msp430f5418a.pdf, Connectivity="I²C, IrDA, LIN, SCI, SPI, UART/USART", Core Processor=MSP430, Core Size=16-Bit, Data Converters="A/D 16x12b", Digikey=296-37147-1-ND, EEPROM Size=-, Number of I/O=87, Oscillator Type=Internal, Packaging="Cut Tape (CT)", Peripherals="Brown-out Detect/Reset, DMA, POR, PWM, WDT", Pricing 1="1=10.57, 10=9.5, 25=8.6404, 100=7.8215, 250=7.16624, 500=6.552, 750=6.01965, 1000=5.11875 (USD)", Program Memory Size="256KB (256K x 8)", Program Memory Type=FLASH, RAM Size="16K x 8", RoHS="RoHS Compliant", Speed=25MHz, Stock 1=6499, Supplier 1=Digi-Key
"XBEE S1": "XB24CZ7WIT-004"
Y1: "Crystal 16MHz 18pF 2-Pin SMD T/R", Package="HC49/US ECS International", Digi-Key_Part_Number=XC1695CT-ND, Digi-Key_Purchase_URL=https://www.digikey.com/product-detail/en/ecs-inc/ECS-160-18-5PXEN-TR/XC1695CT-ND/2213847?utm_source=snapeda&utm_medium=aggregator&utm_campaign=symbol, MF="ECS Inc.", MP=ECS-160-18-5PXEN-TR, SnapEDA_Link=https://www.snapeda.com/parts/ECS-160-18-5PXEN-TR/ECS%20Inc./view-part/?ref=snap
ANT_L1 ANT_L2 ANT_L3 SD_L1: Code_IEC=1005, Code_JEITA=0402, LatestRevisionDate=29-May-2009, LatestRevisionNote="IPC-7351 Footprint Added.", PackageDescription="Chip Inductor", PackageReference=0402-A, Published=8-Jun-2000, Publisher="Altium Limited"

## Free pads (board coordinates)
  round 5.5 hole 2.5: 1(3.5,-96.5) 1(3.5,-3.5) 1(22.8,-3.5) 1(61.5,-3.5) 1(76.5,-96.5) 1(76.5,-3.5)

## Via types
v1: diameter 0.75, hole 0.45, Top Layer to Bottom Layer, 80 vias
v2: diameter 0.74, hole 0.45, Top Layer to Bottom Layer, 1 vias

## Nets (pads, with @x,y where several pads share a name; then routed paths per layer and width w, separated by ;. In a path a pad name is that pad's centre, name@x,y a point inside that pad or via, vN(x,y) a via of type N, cw(c..) or ccw(c..) an arc to the next point about the centre after c; other vN are vias at no path point)
3V3: 3V3.1 "Pressure Sensor1.5" "Pressure Sensor1.6" "XBEE S1.1" APRS1.8 C1.2 C3.2 C4.2 C5.2 C6.2 C7.2 C_GPS2.2 C_GPS3.2 C_GPS.2 C_H1.2 C_H2.2 C_P1.2 C_P2.2 GPS1.1 GPS1.8 GPS1.9 Humid1.8 LDO.3 P4.2 R4.1 R8.2 R9.2 SD_L1.2 SD_R1.2 SD_R2.2 SD_R3.2 SD_R5.1 U1.11 U1.16 U1.38 U1.64 U1.87 V_R4.2 VHF_C2.2 VHF_C3.2 VHF_C4.2 XB_C2.2 XB_C.2 | length 147.6
  Top Layer w0.254: LDO.3 LDO.3@24.329,-67.652 ; APRS1.8 APRS1.8@24.774,-27.5 ; APRS1.8@24.782,-27.347 APRS1.8@24.798,-27.353 ; v1(26.979,-27.5) 26.979,-31.2 28.679,-32.9 V_R4.2 ; C_H1.2 32.489,-69.311 C_H2.2 ; C_H2.2@32.5,-69.453 Humid1.8@34.742,-69.453 ; Humid1.8 34.779,-69.5 v1(36.6,-69.5) ; C_GPS.2@34.816,-94.604 C_GPS.2@34.751,-94.669 ; 36.594,-86.543 37.283,-86.543 GPS1.1 GPS1.1@37.387,-86.495 ; GPS1.8@36.766,-93.543 36.94,-93.543 GPS1.8 GPS1.8@37.61,-93.543 ; v1(37.283,-76.2) 45.088,-76.2 55.21,-86.322 55.214,-86.326 XB_C.2 XB_C2.2@58.963,-86.326 ; v1@37.283,-43.522 37.283,-43.37 38.147,-42.506 R4.1 ; GPS1.9@37.549,-94.604 GPS1.9@37.61,-94.543 ; U1.11@37.826,-51.412 U1.11 37.624,-51.412 C5.2 35.3,-51.688 v1(35.3,-52.412) 35.3,-53.2 C6.2 37.188,-53.912 U1.16 ; v1(41.15,-63.077) R8.2 ; v1(46.173,-57.1) U1.38 46.173,-60.794 46.681,-61.302 47.573,-61.302 48.55,-62.279 R9.2@48.55,-63.7 ; v1@46.673,-46.189 U1.87 46.686,-44.787 46.686,-44.052 47.216,-43.522 47.951,-43.522 C4.2 ; C_P2.2 C_P1.2 51.375,-70.87 51.375,-70.1 51.375,-68.85 ; v1(51.2,-52.2) 51.2,-52.124 51.412,-51.912 U1.64 54.52,-51.912 54.852,-51.579 54.852,-50.083 C3.2@55.935,-49 ; SD_L1.2 v1(55.95,-45.25) SD_R5.1 ; SD_R1.2 58.976,-31.874 67.026,-31.874 v1(67.15,-31.75) ; SD_R3.2 v1(67.15,-31.75) ; SD_R2.2 v1(67.15,-31.75) ; C_GPS.2@34.751,-94.669 34.562,-94.669 34.562,-94.858 C_GPS.2@34.751,-94.669
  Top Layer w0.4: APRS1.8@24.774,-27.5 v1(26.979,-27.5)
  Top Layer w0.5: VHF_C4.2@18.855,-27.545 APRS1.8 ; LDO.3@24.329,-67.652 C1.2 24.775,-61.175 P4.2 ; C_GPS2.2@31.006,-94.734 31.071,-94.669 34.562,-94.669 35.688,-93.543 36.766,-93.543 36,-92.777 36,-87.137 36.594,-86.543 ; C_GPS.2@34.816,-94.604 GPS1.9@37.549,-94.604 ; GPS1.1@37.283,-86.543 v1(37.283,-76.2) ; GPS1.1@37.387,-86.495 37.5,-86.382 GPS1.1@37.483,-86.365
  Signal Layer 2 w0.254: v1(41.15,-63.077) v1@41.173,-63.1
  other v1: 48.8,-72.3 46.673,-46.389 37.283,-43.722
buzzer: B_R.2 Mosfet_Buzzer.1 U1.28 | length 13.7
  Top Layer w0.254: B_R.2@31.05,-58 31.15,-58.1 Mosfet_Buzzer.1 31.916,-61.091 41.125,-61.091 41.173,-61.043 U1.28
FTU_CTL: Q1.1 R1.1 U1.65 | length 52
  Top Layer w0.254: Q1.1 10.83,-29.65 R1.1 22.05,-29.65 37.894,-45.494 39.456,-45.494 45.375,-51.412 U1.65
GND: "Battery Connector1.1" "Pressure Sensor1.2" "Pressure Sensor1.3" "XBEE S1.10" ANT_C1.1 ANT_C2.1 ANT_C3.1 ANT_C4.1 APRS1.7 APRS1.9 APRS1.10 B_R.1 C1.1 C2.2 C3.1 C4.1 C5.1 C6.1 C7.1 C8.2 C_GPS2.1 C_GPS3.1 C_GPS.1 C_H1.1 C_H2.1 C_H3.1 C_P1.1 C_P2.1 D1.2 GND.1 GPS1.4 GPS1.5 GPS1.10 GPS1.11 GPS1.12 GPS1.13 GPS1.14 GPS1.15 GPS1.18 GPS1.19 GPS1.21 GPS1.22 GPS1.27 GPS1.31 Humid1.2 J1.2 J1.3 J1.4 J1.5 J2.6 J3.1 LDO.2 Mosfet_Buzzer.2 pp1.9 Q1.3 R1.2 R3.1 R5.1 R6.1 R7.1 SD_C2.1 SD_C3.1 SD_C.1 SD_R4.1 SD_R.1 U1.12 U1.15 U1.37 U1.63 U1.88 VHF_C1.1 VHF_C2.1 VHF_C3.1 VHF_C4.1 XB_C2.1 XB_C.1 XT_C1.1 XT_C2.1 | length 136.2
  Top Layer w0.254: Q1.3 14.1,-31.4 R1.2 ; D1.2 17.268,-62.699 v1@17.979,-61.988 ; VHF_C2.1 VHF_C2.1@22.2,-26 ; APRS1.9@24.729,-23.471 APRS1.9 ; Mosfet_Buzzer.2 v1(29.25,-59.1) 29.4,-58.95 29.4,-58.15 B_R.1@29.55,-58 ; C_H1.1 30.817,-67.9 C_H2.1 ; C_GPS2.1 31.021,-96.004 C_GPS2.1@31.025,-96 ; v1@31.904,-96 v1(32,-96) ; C_GPS3.1@32.846,-96.134 C_GPS3.1@32.911,-96.069 ; v1(35.9,-98.7) 35.907,-98.693 GPS1.13 ; v1(35.9,-97.543) GPS1.12 GPS1.12@37.61,-97.543 ; v1(35.9,-96.6) 35.957,-96.543 GPS1.11 ; C6.1 36.912,-53.412 U1.15 v1(39.985,-53.412) ; C5.1 36.724,-51.912 U1.12 v1(39.95,-51.912) ; GPS1.11@37.387,-96.766 GPS1.11@37.61,-96.543 ; GPS1.5 v1(39,-90.543) ; GPS1.4 v1(39,-89.543) ; GPS1.13@37.483,-98.82 GPS1.13@37.61,-98.693 ; GPS1.4@37.499,-89.654 GPS1.4@37.61,-89.543 ; Humid1.2 39.909,-68 C_H3.1 43.2,-68 v1(43.5,-67.7) 45.875,-67.7 46.025,-67.55 46.3,-67.825 46.3,-68.85 ; GPS1.31 39.9,-86.208 v1(39.9,-87.5) ; v1(43.8,-87.5) 43.8,-86.178 GPS1.27 ; v1(44.8,-93.543) GPS1.19 ; v1(44.8,-91.543) GPS1.21 ; v1(44.8,-90.543) GPS1.22 ; v1(45.375,-58.3) 45.673,-58.598 45.673,-61.691 46.173,-62.191 C7.1@47.062,-62.191 ; R3.1 v1@46.173,-43.471 ; GPS1.15@46.172,-97.655 46.117,-97.6 v1(47.845,-97.6) ; U1.88 v1(46.173,-43.6) v1@46.173,-43.471 ; GPS1.14 47.838,-98.693 v1(47.845,-98.7) ; GPS1.18 47.788,-94.543 v1(47.845,-94.6) ; C4.1 v1@46.173,-43.471 ; C_P2.1 C_P1.1 ; v1(52.2,-52.6) 52.2,-52.524 52.312,-52.412 U1.63 54.823,-52.412 C8.2 C3.1@55.935,-50.4 ; VHF_C1.1 54,-7.1 54.2,-7.3 v1(54.9,-7.3) ; R5.1 56.218,-59.766 v1@57.2,-59.766 ; SD_C2.1 SD_C3.1 SD_C.1 ; XB_C.1 XB_C2.1@58.963,-84.926 ; v1(57.2,-60.1) 57.2,-59.834 57.166,-59.8 v1@57.2,-59.766 ; SD_R4.1 v1(58.8,-34.25) ; R6.1 v1@57.2,-59.766 ; R6.1@58.111,-59.651 58.087,-59.651 58.202,-59.766 R7.1 ; v1(59,-83.6) 59.025,-83.625 XB_C2.1 ; SD_R.1 SD_C.1 ; J2.6@60.845,-43.097 59.597,-43.097 SD_C.1 ; J2.6 61.002,-43.254 J2.6@61.056,-43.2 ; J2.6@61.056,-43.2 v1(63.5,-43.2)
  Top Layer w0.5: J3.1 18.004,-50.15 v1(18.004,-51.1) ; VHF_C4.1 VHF_C2.1 ; VHF_C2.1@22.2,-26 v1(23.8,-26) ; v1(28.8,-27.5) 28.8,-29.166 APRS1.7@28.879,-29.245 ; C_GPS2.1@31.025,-96 v1(32,-96) ; v1@31.904,-96 C_GPS3.1@32.9,-96 ; C_GPS3.1@32.911,-96.069 34.751,-96.069 35.277,-95.543 GPS1.10@37.149,-95.543
  Top Layer w0.6: v1@20.268,-61.988 C2.2 C1.1 21.535,-62.569 LDO.2
  Top Layer w0.725: APRS1.9@24.774,-22.945 v1(24.774,-20.7) APRS1.10@24.774,-18.345
  Top Layer w0.8: ANT_C4.1 v1(11.7,-12.8) ANT_C3.1 ANT_C2.1 v1(19.7,-12.8) ANT_C1.1
  Bottom Layer w0.254: XT_C1.1 35.2,-46.7 35.2,-50.2 36.912,-51.912 v1(39.95,-51.912) ; XT_C2.1 51.7,-53.1 v1(52.2,-52.6)
  other v1: 48.8,-73.7 31.658,-67.9 17.979,-62.188 20.268,-62.188 15.7,-12.8
GPS_UART_RX: GUART.SM.1 R12.1 U1.40 | length 38.4
  Top Layer w0.254: U1.40 47.173,-58.952 48.125,-58 v1(48.205,-58) ; GUART.SM.1 50.1,-90.6 51.2,-89.5 v1(51.2,-87.1) 51.186,-87.114 R12.1
  Bottom Layer w0.254: v1(48.205,-58) 48.205,-58.2 51,-60.995 v1@51,-87.1
GPS_UART_TX: GUART.MS.1 R13.1 U1.39 | length 39
  Top Layer w0.254: U1.39 46.673,-58.507 47.18,-58 v1(47.2,-58) v1@47.2,-57.906 ; R13.1 50.171,-84.529 52.373,-86.731 GUART.MS.1
  Signal Layer 1 w0.254: v1(47.2,-58) v1@47.2,-57.906
  Bottom Layer w0.254: v1(47.2,-58) 50,-60.8 v1@50,-84.5
  other v1: 50.2,-84.5
I2C_SCL: "Pressure Sensor1.1" Humid1.3 R9.1 SCL.1 U1.35 | length 23
  Top Layer w0.254: Humid1.3 v1(42,-66.965) 42.141,-66.965 42.806,-66.3 46.025,-66.3 44.673,-64.948 44.673,-63.7 ; U1.35 44.673,-63.7 ; R9.1@47.05,-63.7 44.673,-63.7
  Bottom Layer w0.254: SCL.1 38.5,-70.465 v1(42,-66.965)
I2C_SDA: "Pressure Sensor1.7" Humid1.4 R8.1 SDA.1 U1.34 | length 35.4
  Top Layer w0.254: SDA.1 36.2,-70.905 37.105,-70 38.3,-70 ; R8.1 44.173,-62.1 ; U1.34 44.173,-62.1 ; 51.375,-67.55 51.325,-67.6 49.452,-67.6 48.7,-68.352 48.7,-70.2 48,-70.9 39.2,-70.9 38.3,-70 ; 38.3,-70 38.3,-66.4 39.005,-65.695 Humid1.4 41.209,-65.695 44.173,-62.731 44.173,-62.1
LED1: D2.2 U1.59 | length 2.7
  Top Layer w0.254: U1.59 55.158,-54.412 55.976,-55.23 D2.2
LED2: D3.2 U1.60 | length 4.8
  Top Layer w0.254: U1.60 55.233,-53.912 55.892,-54.571 57.579,-54.571 D3.2
LED3: D4.2 U1.61 | length 7
  Top Layer w0.254: U1.61 55.307,-53.412 56.06,-54.165 57.747,-54.165 58.027,-54.444 59.254,-54.444 D4.2
NetANT_C1_2: ANT_C1.2 ANT_L1.1 APRS1.12 | length 8.4
  Top Layer w0.8: ANT_L1.1 ANT_C1.2 28.834,-11.4 APRS1.12
NetANT_C2_2: ANT_C2.2 ANT_L1.2 ANT_L2.1 | length 2.5
  Top Layer w0.8: ANT_L2.1 ANT_C2.2 ANT_L1.2
NetANT_C3_2: ANT_C3.2 ANT_L2.2 ANT_L3.1 | length 2.5
  Top Layer w0.8: ANT_L3.1 ANT_C3.2 ANT_L2.2
NetANT_C4_2: ANT_C4.2 ANT_L3.2 J1.1 | length 6.4
  Top Layer w0.8: J1.1 4.7,-11.4 ANT_C4.2 ANT_L3.2
NetAPRS1_16: APRS1.16 V_R2.1 | length 2.9
  Top Layer w0.254: V_R2.1@46.6,-8.55 46.679,-8.629 APRS1.16
NetAPRS1_17: APRS1.17 V_R3.1 | length 2.8
  Top Layer w0.254: V_R3.1 51.1,-11.416 APRS1.17
NetAPRS1_18: APRS1.18 V_R1.1 VHF_C1.2 | length 5.3
  Top Layer w0.254: VHF_C1.2@53.903,-8.932 55.935,-8.932 55.935,-11.689 APRS1.18@55.579,-12.045
NetC8_1: C8.1 U1.62 | length 2.2
  Top Layer w0.254: U1.62 55.723,-52.912 C8.1
NetC_H3_2: C_H3.2 Humid1.1 | length 1.9
  Top Layer w0.254: Humid1.1 41.419,-69.505 C_H3.2
NetD1_1: D1.1 R2.1 | length 2.2
  Top Layer w0.254: D1.1 R2.1
NetD2_1: D2.1 R5.2 | length 1.5
  Top Layer w0.254: R5.2 D2.1
NetD3_1: D3.1 R6.2 | length 1.5
  Top Layer w0.254: R6.2@58.111,-58.151 D3.1
NetD4_1: D4.1 R7.2 | length 1.6
  Top Layer w0.254: R7.2 D4.1
NetFTU_R_1: FTU_R.1 NiChr.2 | length 9.4
  Top Layer w2: NiChr.2@4.39,-48.729 4.39,-52.729 5.611,-53.95 FTU_R.1
NetGPS1_16: GPS1.16 GPS1.17 | length 1
  Top Layer w0.254: GPS1.16@46.06,-96.543 GPS1.17@46.06,-95.543
NetGPS1_25: GPS1.25 R12.2 | length 2.8
  Top Layer w0.254: GPS1.25@46.06,-87.543 48.254,-87.543 R12.2
NetGPS1_26: GPS1.26 R13.2 | length 3
  Top Layer w0.254: GPS1.26@46.06,-86.543 47.845,-86.543 R13.2
NetJ2_1: J2.1 SD_R1.1 | length 6
  Top Layer w0.254: SD_R1.1 57.35,-35 58.7,-35 59.5,-35.8 59.5,-36.5 60.6,-37.6 J2.1
NetJ2_8: J2.8 SD_R5.2 | length 4.9
  Top Layer w0.254: SD_R5.2 57.05,-43.75 58.3,-45 60.548,-45 J2.8
NetJ2_P1: J2.P1 J2.P2 J2.P3 J2.P4 | length 43
  Top Layer w0.254: J2.P1@65.145,-47.197 65.145,-40.347 J2.P4 60.845,-36.047 63.195,-33.697 75.945,-33.697 75.266,-34.376 75.266,-47.197 J2.P2@75.495,-47.197
NetJ3_5: J3.5 RB_R1.1 | length 6
  Top Layer w0.254: J3.5 RB_R1.1
NetJ3_8: J3.8
NetJ3_9: J3.9
NetJ3_10: J3.10 RB_R2.1 | length 5.9
  Top Layer w0.254: J3.10 18.004,-38.9 RB_R2.1
NetMCLK_1: MCLK.1 U1.25 | length 13.1
  Top Layer w0.254: MCLK.1 28.8,-56.1 34.3,-56.1 36.61,-58.41 U1.25@38.548,-58.41
NetMosfet_Buzzer_1: Mosfet_Buzzer.3 P4.1 | length 3.7
  Top Layer w0.254: Mosfet_Buzzer.3 30.225,-62.7 P4.1
NetNiChr_1: NiChr.1 Q1.2 | length 10.5
  Top Layer w0.8: NiChr.1@4.39,-32.029 NiChr.1@4.521,-32.16
  Top Layer w2: NiChr.1@4.39,-36.029 NiChr.1@4.39,-32.029 ; NiChr.1@4.521,-32.16 Q1.2
NetSMCLK_1: SMCLK.1 U1.23 | length 10.4
  Top Layer w0.254: SMCLK.1 30.682,-55.694 34.494,-55.694 36.2,-57.4 38.536,-57.4 U1.23
NetU1_89: U1.89 XT_C2.2 Y1.1 | length 8.7
  Top Layer w0.254: U1.89 45.673,-46.773 v1(46.4,-47.5)
  Bottom Layer w0.254: v1(46.4,-47.5) 47.95,-49.05 Y1.1 50,-51.35 XT_C2.2
NetU1_90: U1.90 XT_C1.2 Y1.2 | length 13.5
  Top Layer w0.254: v1(45.173,-47.5) U1.90
  Bottom Layer w0.254: XT_C1.2 38,-49.3 Y1.2 40.25,-47.5 v1(45.173,-47.5)
NetX_R1_2: "XBEE S1.2" X_R1.2 | length 10.1
  Top Layer w0.254: 55.21,-84.315 58.3,-81.225 X_R1.2
NetX_R2_2: "XBEE S1.3" X_R2.2 | length 7.6
  Top Layer w0.254: 55.21,-82.308 56.9,-80.618 X_R2.2
RB_NETAV: J3.7 U1.58 | length 41
  Top Layer w0.254: J3.7 18.154,-42.8 18.321,-42.633 v1(19.7,-42.633) ; v1(47.9,-54.8) 48.012,-54.912 U1.58
  Bottom Layer w0.254: v1(19.7,-42.633) 19.833,-42.633 32,-54.8 v1(47.9,-54.8)
RB_ONOFF: J3.4 U1.56 | length 44.4
  Top Layer w0.254: J3.4 18.475,-46.375 24.075,-51.975 24.075,-55.7 25.287,-56.912 32.212,-56.912 34.116,-58.816 39.366,-58.816 42.27,-55.912 U1.56
RB_RI: J3.6 U1.57 | length 42.7
  Top Layer w0.254: J3.6 19.725,-43.875 21.187,-42.413 34.213,-42.413 37.7,-45.9 39.258,-45.9 39.602,-46.244 39.602,-47.702 47.359,-55.459 53.751,-55.459 U1.57
RB_UART_RX: RB_R2.2 RUART.MS.1 U1.54 | length 38.1
  Top Layer w0.254: RB_R2.2 RUART.MS.1 ; v1(52.057,-56.9) 53.786,-56.9 U1.54
  Bottom Layer w0.254: RUART.MS.1 26.979,-42.679 36.866,-52.566 47.723,-52.566 v1(52.057,-56.9)
RB_UART_TX: RB_R1.2 RUART.SM.1 U1.53 | length 33.8
  Top Layer w0.254: RB_R1.2 27.175,-45.125 RUART.SM.1 ; v1(51.329,-57.5) 51.384,-57.554 52.328,-57.554 52.471,-57.412 U1.53
  Bottom Layer w0.254: RUART.SM.1 27.2,-45.237 36.063,-54.1 48.125,-54.1 51.329,-57.304 v1(51.329,-57.5)
RESET: pp1.11 R4.2 U1.96 | length 10.6
  Top Layer w0.254: pp1.11 41.855,-38.442 41.855,-41.109 ; R4.2 40.966,-41.109 41.855,-41.109 ; U1.96 42.173,-44.065 41.855,-43.747 41.855,-41.109
RF_MIC_IN: RF_MIC.1 U1.27 V_R1.2 | length 83
  Top Layer w0.254: U1.27 40.673,-58.627 42.982,-56.318 49.018,-56.318 51.607,-58.907 v1(61.2,-58.907) ; RF_MIC.1 55.9,-7.115 V_R1.2
  Bottom Layer w0.254: RF_MIC.1 56.5,-5.6 62.7,-11.8 62.7,-45.047 60.8,-46.947 60.8,-49.8 61.2,-50.2 v1(61.2,-58.907)
RF_PD: APRS1.6 U1.19 | length 29.3
  Top Layer w0.254: v1(33.2,-44) 33.2,-52.5 36.112,-55.412 U1.19 ; v1(33.2,-32.1) 33.2,-29.974 APRS1.6
  Bottom Layer w0.254: v1(33.2,-44) v1(33.2,-32.1)
RF_PTT: APRS1.5 U1.20 V_R4.1 | length 33.5
  Top Layer w0.254: v1(33.9,-43.1) 32.9,-43.1 32.4,-43.6 32.4,-52.275 36.037,-55.912 U1.20 ; v1(37.7,-33.7) 37.7,-32.979 37.779,-32.9 APRS1.5@37.779,-29.245
  Bottom Layer w0.254: v1(33.9,-43.1) 33.9,-37.5 v1(37.7,-33.7)
RF_RXD: U1.80 V_R2.2 VUART.MS.1 | length 47.3
  Top Layer w0.254: V_R2.2 VUART.MS.1 ; U1.80 50.173,-44.027 51.375,-42.825 v1(51.375,-42.506)
  Bottom Layer w0.254: VUART.MS.1 54.894,-13.815 54.894,-41.106 53.494,-42.506 v1(51.375,-42.506)
RF_TXD: U1.81 V_R3.2 VUART.SM.1 | length 47
  Top Layer w0.254: U1.81 49.673,-43.227 49.7,-43.254 49.754,-43.2 v1(49.8,-43.2) ; V_R3.2 51.129,-7.121 VUART.SM.1
  Bottom Layer w0.254: v1(49.8,-43.2) 53.375,-43.2 55.3,-41.275 55.3,-9.771 VUART.SM.1
SD_CLK: J2.5 SD_CLK.1 U1.79 | length 33.6
  Top Layer w0.254: v1(50.2,-46.5) 50.673,-46.027 U1.79 ; J2.5@60.845,-41.997 J2.5 v1(62,-42) 62.003,-41.997 v2(64.3,-41.997)
  Bottom Layer w0.254: v1(50.2,-46.5) 52.6,-44.1 59.9,-44.1 v1(62,-42) ; v2(64.3,-41.997) 64.3,-32.7 SD_CLK.1
SD_CS: J2.2 SD_R4.2 U1.76 | length 15.1
  Top Layer w0.254: U1.76@52.173,-44.792 U1.76 52.173,-43.727 57.203,-38.697 ; SD_R4.2 57.9,-38 57.203,-38.697 ; J2.2@60.845,-38.697 57.203,-38.697
SD_MISO: J2.7 SD_MISO.1 SD_R3.1 U1.78 | length 40
  Top Layer w0.254: U1.78 51.2,-44.814 v1(51.2,-47) ; J2.7@60.845,-44.197 61.897,-44.197 v1(61.9,-44.2) v1(64.4,-44.2) ; SD_R3.1 70.955,-30.195 SD_MISO.1
  Bottom Layer w0.254: v1(51.2,-47) 51.811,-46.389 59.711,-46.389 v1(61.9,-44.2) ; v1(64.4,-44.2) 65.5,-43.1 65.5,-34.455 SD_MISO.1
SD_MOSI: J2.3 SD_MOSI.1 SD_R2.1 U1.77 | length 32
  Top Layer w0.254: U1.77 51.673,-45.7 51.814,-45.841 52.341,-45.841 52.579,-45.602 52.579,-44.075 56.858,-39.797 J2.3@60.845,-39.797 ; J2.3 63.397,-39.8 v1(63.4,-39.797) ; SD_MOSI.1 66.271,-30.271 67.921,-30.271 SD_R2.1
  Bottom Layer w0.254: v1(63.4,-39.797) 63.4,-30.6 SD_MOSI.1
SD_SWA: J2.SWA U1.75 | length 18.5
  Top Layer w0.254: U1.75 57.712,-46.412 59.3,-48 70.542,-48 J2.SWA@71.345,-47.197
SD_SWB: J2.SWB SD_R.2 U1.74 | length 10
  Top Layer w0.254: U1.74 53.076,-46.912 52.744,-46.579 52.744,-46.244 52.988,-46 58.95,-46 SD_R.2 59.697,-46.247 J2.SWB@60.845,-46.247
SD_VDD: J2.4 SD_C2.2 SD_C3.2 SD_C.2 SD_L1.1 | length 7.4
  Top Layer w0.254: SD_L1.1 55.3,-42.6 SD_C2.2 SD_C3.2 SD_C.2 59.603,-40.897 60.845,-40.897 J2.4
TCK: pp1.7 U1.95 | length 9.2
  Top Layer w0.254: U1.95 42.668,-44.782 42.668,-43.133 42.4,-42.865 42.4,-41.7 43.359,-40.741 43.551,-40.741 44.154,-40.138 44.154,-38.682 pp1.7
TDI: pp1.3 U1.93 | length 16.1
  Top Layer w0.254: U1.93 v1@43.673,-42.2
  Signal Layer 1 w0.254: v1(43.6,-42.2) 43.62,-42.22 v1@43.62,-42.446 ; v1@43.62,-42.446 43.633,-42.459 43.633,-42.433 v1@43.62,-42.446
  Bottom Layer w0.254: v1(43.6,-42.2) 42.084,-40.684 42.084,-39.077 42.661,-38.5 49.417,-38.5 pp1.3
TDO: pp1.1 U1.92 | length 15.4
  Top Layer w0.254: v1(44.173,-46.081) U1.92
  Bottom Layer w0.254: v1(44.173,-46.081) 44.819,-46.081 49.5,-41.4 49.5,-39.2 50.3,-38.4 52.057,-38.4 pp1.1
TMS: pp1.5 U1.94 | length 11.1
  Top Layer w0.254: U1.94 43.173,-43.063 42.806,-42.696 42.806,-41.894 43.552,-41.148 43.72,-41.148 44.624,-40.244 44.624,-39.077 45.03,-38.671 46.706,-38.671 pp1.5
TST: pp1.8 R3.2 U1.91 | length 5.6
  Top Layer w0.254: U1.91 44.673,-42.784 R3.2 45.665,-41.49 pp1.8
VBAT: "Battery Connector1.2" FTU_R.2 S1.1 | length 29.3
  Top Layer w0.8: S1.1@11.248,-83.654 11.248,-80.152 17.2,-74.2 ; S1.1@11.25,-91.02 S1.1@11.25,-83.4
  Top Layer w2: FTU_R.2 13.79,-73.94 17.2,-73.94
VBAT_SW: C2.1 J3.2 LDO.1 R2.2 S1.2 VBAT.1 | length 55
  Top Layer w0.254: R2.2 18.844,-57.516 18.868,-57.492
  Top Layer w0.6: J3.2 16.925,-48.875 16.5,-49.3 16.5,-55.124 18.868,-57.492 C2.1 LDO.1@18.868,-67.779 ; 19.7,-68.611 23,-71.911 VBAT.1
  Top Layer w0.8: S1.2@17.598,-91.274 17.598,-83.654 19.7,-81.552 19.7,-68.611 LDO.1 LDO.1@18.868,-67.779
XB_RX: U1.72 X_R2.1 XUART.MS.1 | length 36.2
  Top Layer w0.254: v1(51.673,-47.912) 51.715,-47.954 53.732,-47.954 53.786,-47.9 U1.72 ; X_R2.1 v1(56.9,-73.1) 56.9,-71.7 57.5,-71.1 XUART.MS.1
  Bottom Layer w0.254: v1(51.673,-47.912) 51.9,-47.912 54.4,-50.412 54.4,-60.6 56.9,-63.1 v1(56.9,-73.1)
XB_SLEEP: "XBEE S1.9" U1.67 | length 22.6
  Top Layer w0.254: v1(52.312,-50.4) 53.786,-50.4 U1.67
  Bottom Layer w0.254: v1(52.312,-50.4) 53.8,-51.888 53.8,-68.859 55.21,-70.269
XB_TX: U1.73 X_R1.1 XUART.SM.1 | length 33.1
  Top Layer w0.254: v1(52.4,-47.3) 52.5,-47.4 53.786,-47.4 U1.73 ; X_R1.1 v1(58.3,-73.1) XUART.SM.1
  Bottom Layer w0.254: v1(52.4,-47.3) 52.4,-47.364 55,-49.964 55,-60.4 58.3,-63.7 v1(58.3,-73.1)
pads on no net: "Pressure Sensor1.4" "Pressure Sensor1.8" "XBEE S1.4" "XBEE S1.5" "XBEE S1.6" "XBEE S1.7" "XBEE S1.8" "XBEE S1.11" "XBEE S1.12" "XBEE S1.13" "XBEE S1.14" "XBEE S1.15" "XBEE S1.16" "XBEE S1.17" "XBEE S1.18" "XBEE S1.19" "XBEE S1.20" APRS1.1 APRS1.2 APRS1.3 APRS1.4 APRS1.11 APRS1.13 APRS1.14 APRS1.15 GPS1.2 GPS1.3 GPS1.6 GPS1.7 GPS1.20 GPS1.23 GPS1.24 GPS1.28 GPS1.29 GPS1.30 Humid1.5 Humid1.6 Humid1.7 J3. J3.3 pp1.2 pp1.4 pp1.6 pp1.10 pp1.12 pp1.13 pp1.14 U1.1 U1.2 U1.3 U1.4 U1.5 U1.6 U1.7 U1.8 U1.9 U1.10 U1.13 U1.14 U1.17 U1.18 U1.21 U1.22 U1.24 U1.26 U1.29 U1.30 U1.31 U1.32 U1.33 U1.36 U1.41 U1.42 U1.43 U1.44 U1.45 U1.46 U1.47 U1.48 U1.49 U1.50 U1.51 U1.52 U1.55 U1.66 U1.68 U1.69 U1.70 U1.71 U1.82 U1.83 U1.84 U1.85 U1.86 U1.97 U1.98 U1.99 U1.100

## Polygon pours and split planes (outlines as drawn)
GND on Signal Layer 2 "Signal Layer 2-GND" (solid, remove dead copper, pour order 34): 0,-100 0,-76.9 80,-76.9 80,-100
3V3 on Signal Layer 2 "3V3_L03_P026" (solid, remove dead copper, pour order 26): 0.004,-100 0.004,-76.9 79.967,-76.9 79.967,-100 80.004,-100 79.967,0 -0.051,0.039 -0.051,-5.168
GND on Signal Layer 1 "GND_L02_P020" (solid, remove dead copper, pour order 20): 80.004,-100 79.967,0 -0.051,0.039 -0.051,-5.168 0.004,-100
GND on Bottom Layer "Bottom Layer-GND" (solid, remove dead copper, pour order 32): 0,0 0,-100 80,-100 80,0
GND on Top Layer "Top Layer-GND" (solid, remove dead copper, pour order 30): 0,0 0,-100 80,-100 80,0

## Silkscreen, mask and mechanical layers (free items; w line width, h text height)
Top Overlay:
  rectangle: 71.3,-61.6 72.8,-59.9
  lines w0.152: 72.7,-60.6 73.3,-60.6 ; 73.3,-62.1 73.3,-60.6 ; 73.3,-59.2 73.3,-60.6
  lines w0.254: 44.776,-35.775 46.808,-35.775 ; 44.776,-35.648 46.808,-35.648 ; 44.776,-35.548 46.808,-35.548 ; 44.776,-35.448 46.808,-35.448 ; 44.776,-35.348 46.808,-35.348 ; 44.776,-35.248 46.808,-35.248 ; 72.049,-60.39 ccw(c70.4,-59.4) 72.3,-59.1 cw(c72.925,-58.475) 72.3,-57.85 ; 72.3,-57.849 ccw(c71.644,-57.3) 72.3,-56.75 cw(c72.45,-56.6) 72.3,-56.45 72.3,-56.05 ; 72.3,-56.05 73.7,-54.65 ccw(c72.301,-53.37) 71,-54.75 72.3,-56.05 ; 56.5,-86.4 56.5,-86.4
  text "ATACS" at 64.7,-57.5 h2
  text "V1.1" at 66.3,-58.4 h1
Mechanical 1:
  the board outline again, w0.254

## Text inside footprints (layer, text, board x,y; h text height)
APRS1: Top Overlay "NC" at 32.323,-19.883 h0.5 r180; Top Overlay "NC" at 57.215,-20.645 h0.5 r90
GPS1: Top Overlay "GND  / Keep / Out" at 44.248,-95.41 h0.5 r180
J2: Top Overlay "EDGE" at 74.945,-42.832 h0.5 r90
LDO: Top Overlay "VOUT" at 24.71,-64.731 h0.5 r90; Top Overlay "GND" at 22.043,-64.731 h0.5 r90; Top Overlay "VIN" at 19.63,-64.731 h0.5 r90
NiChr: Top Overlay "P2" at 1.977,-50.126 h0.5 r270; Top Overlay "P1" at 2.104,-33.362 h0.5 r270
Q1: Top Overlay "S" at 6.275,-34.2 h0.5 r270; Top Overlay "D" at 6.275,-31.66 h0.5 r270; Top Overlay "G" at 6.228,-29.112 h0.5 r270
S1: Top Overlay "Switch" at 26.363,-83.146 h0.5 r270